# Altium PCB TestDevicePcb.PcbDoc
Units mm, origin at the board's own origin, x right, y up, seen from the top; angles counter-clockwise.
Board outline 100 x 100 mm, 4 copper layers (Top Layer 1, Top Layer, Bottom Layer, Bottom Layer 1), stack 0.602 mm thick; 53 components, 49 nets, 168 pads, 45 vias.
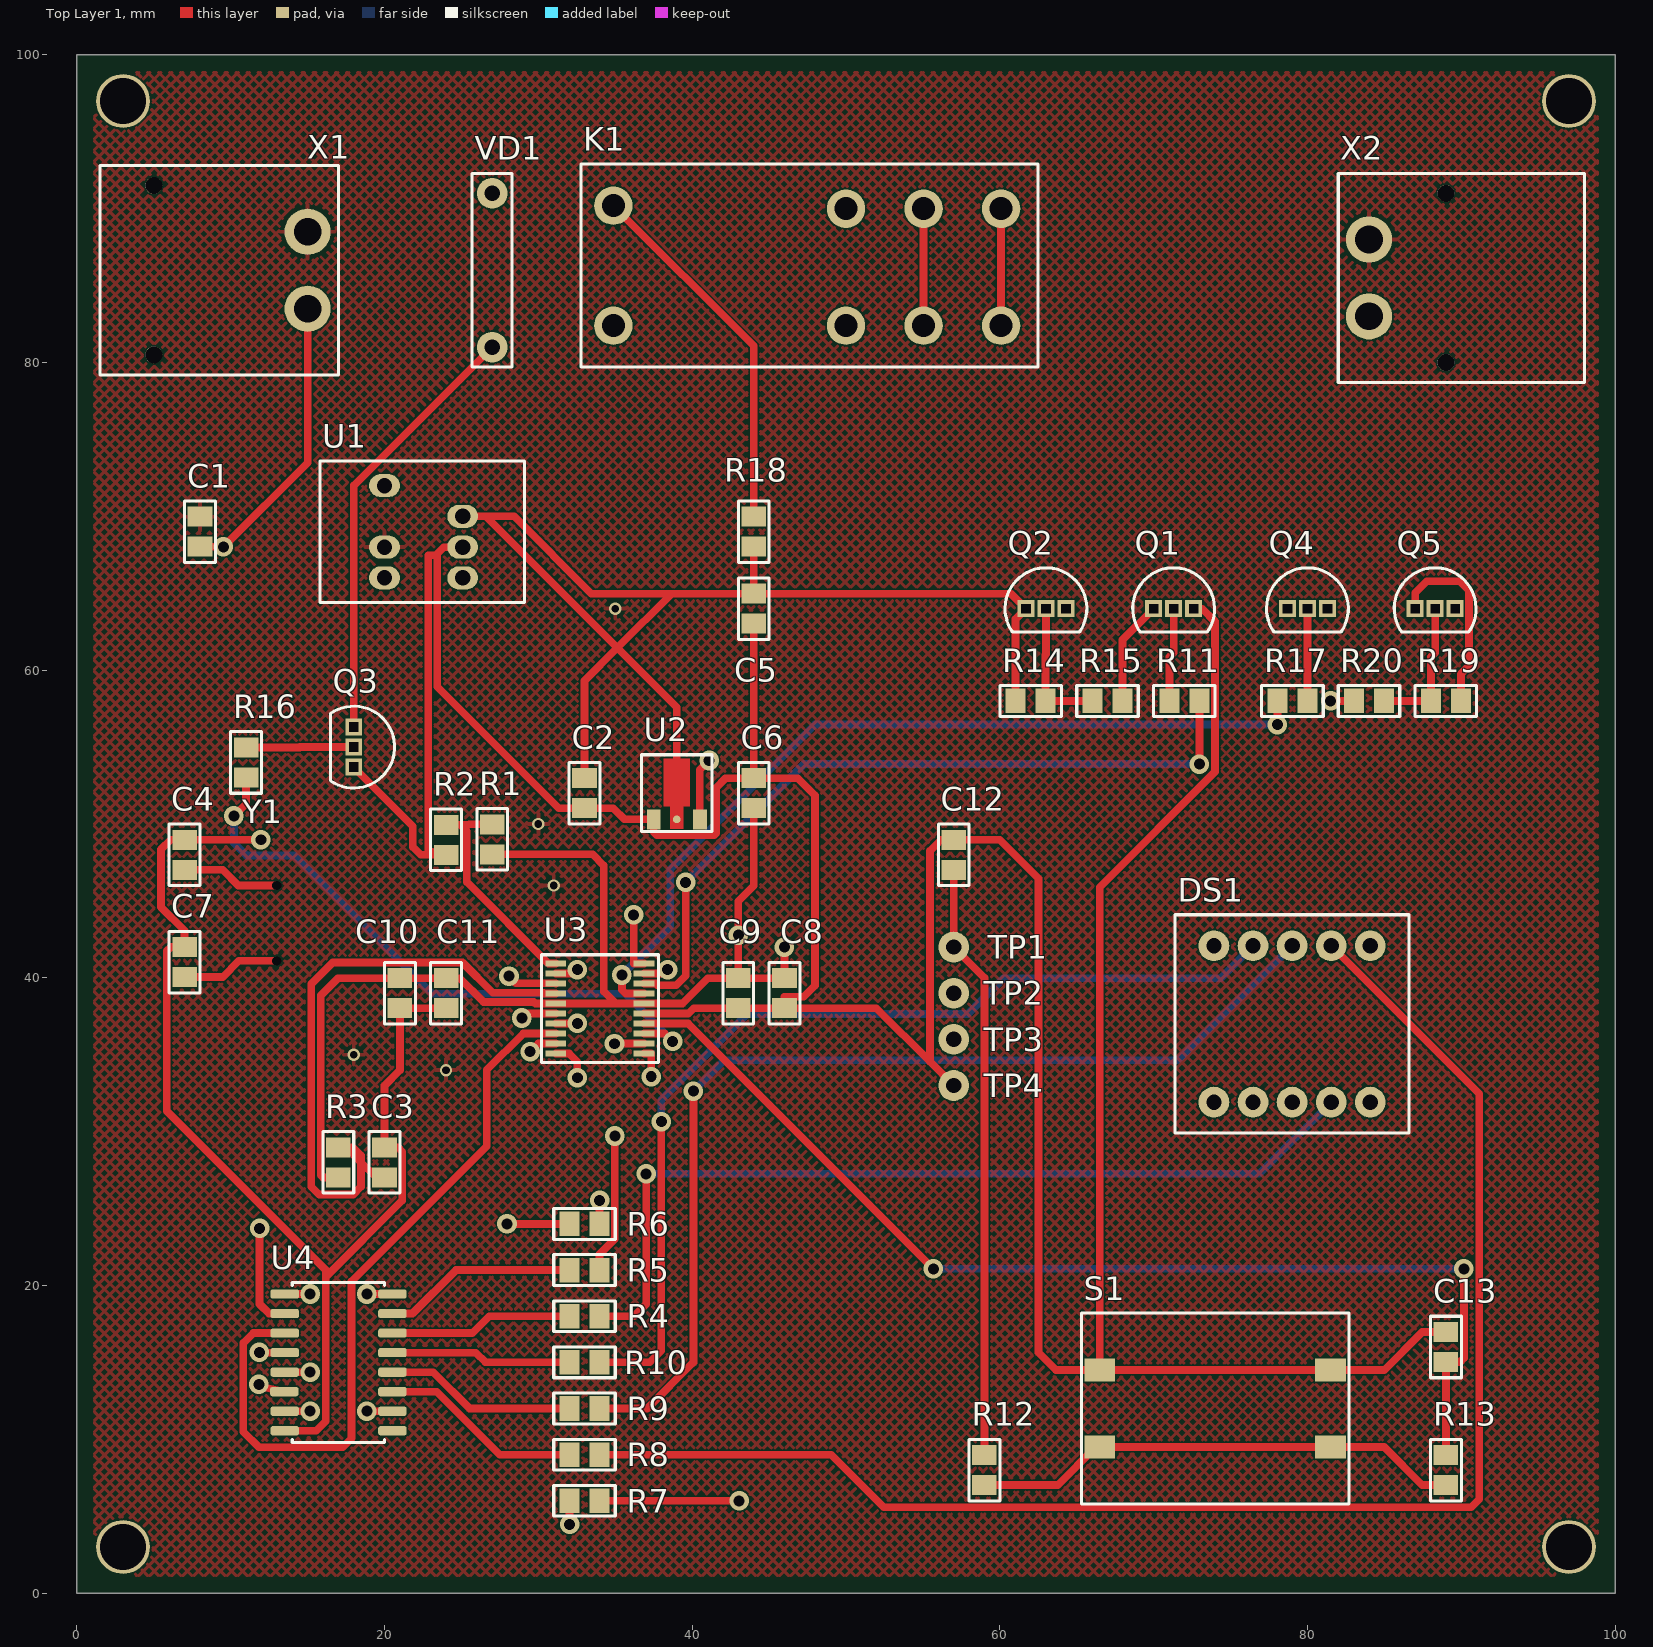
[diagram p0: Top Layer 1 view]
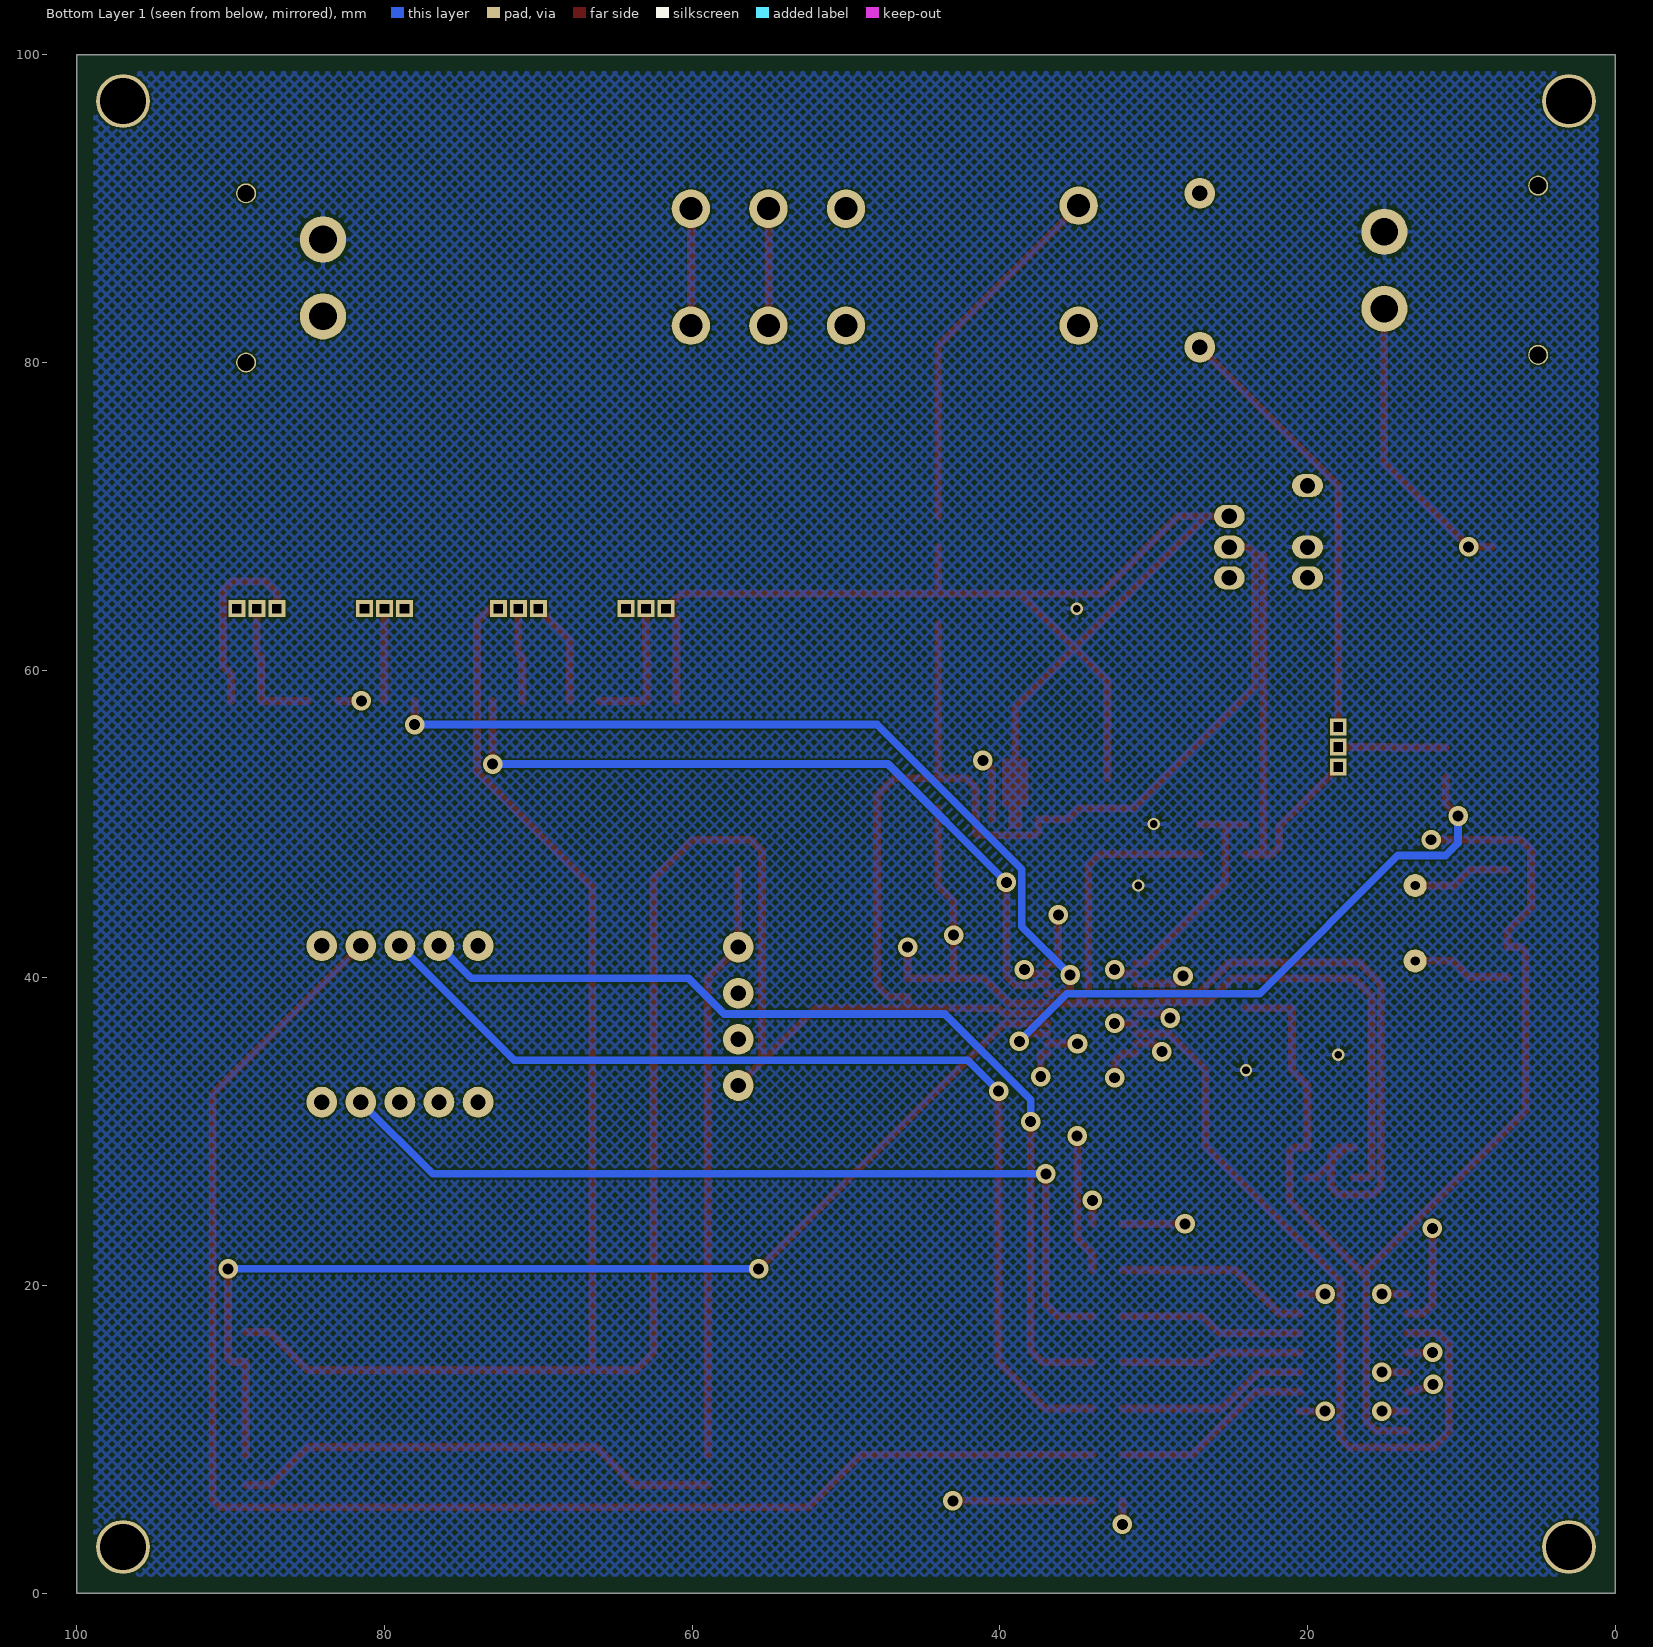
[diagram p1: Bottom Layer 1 view, seen from below]
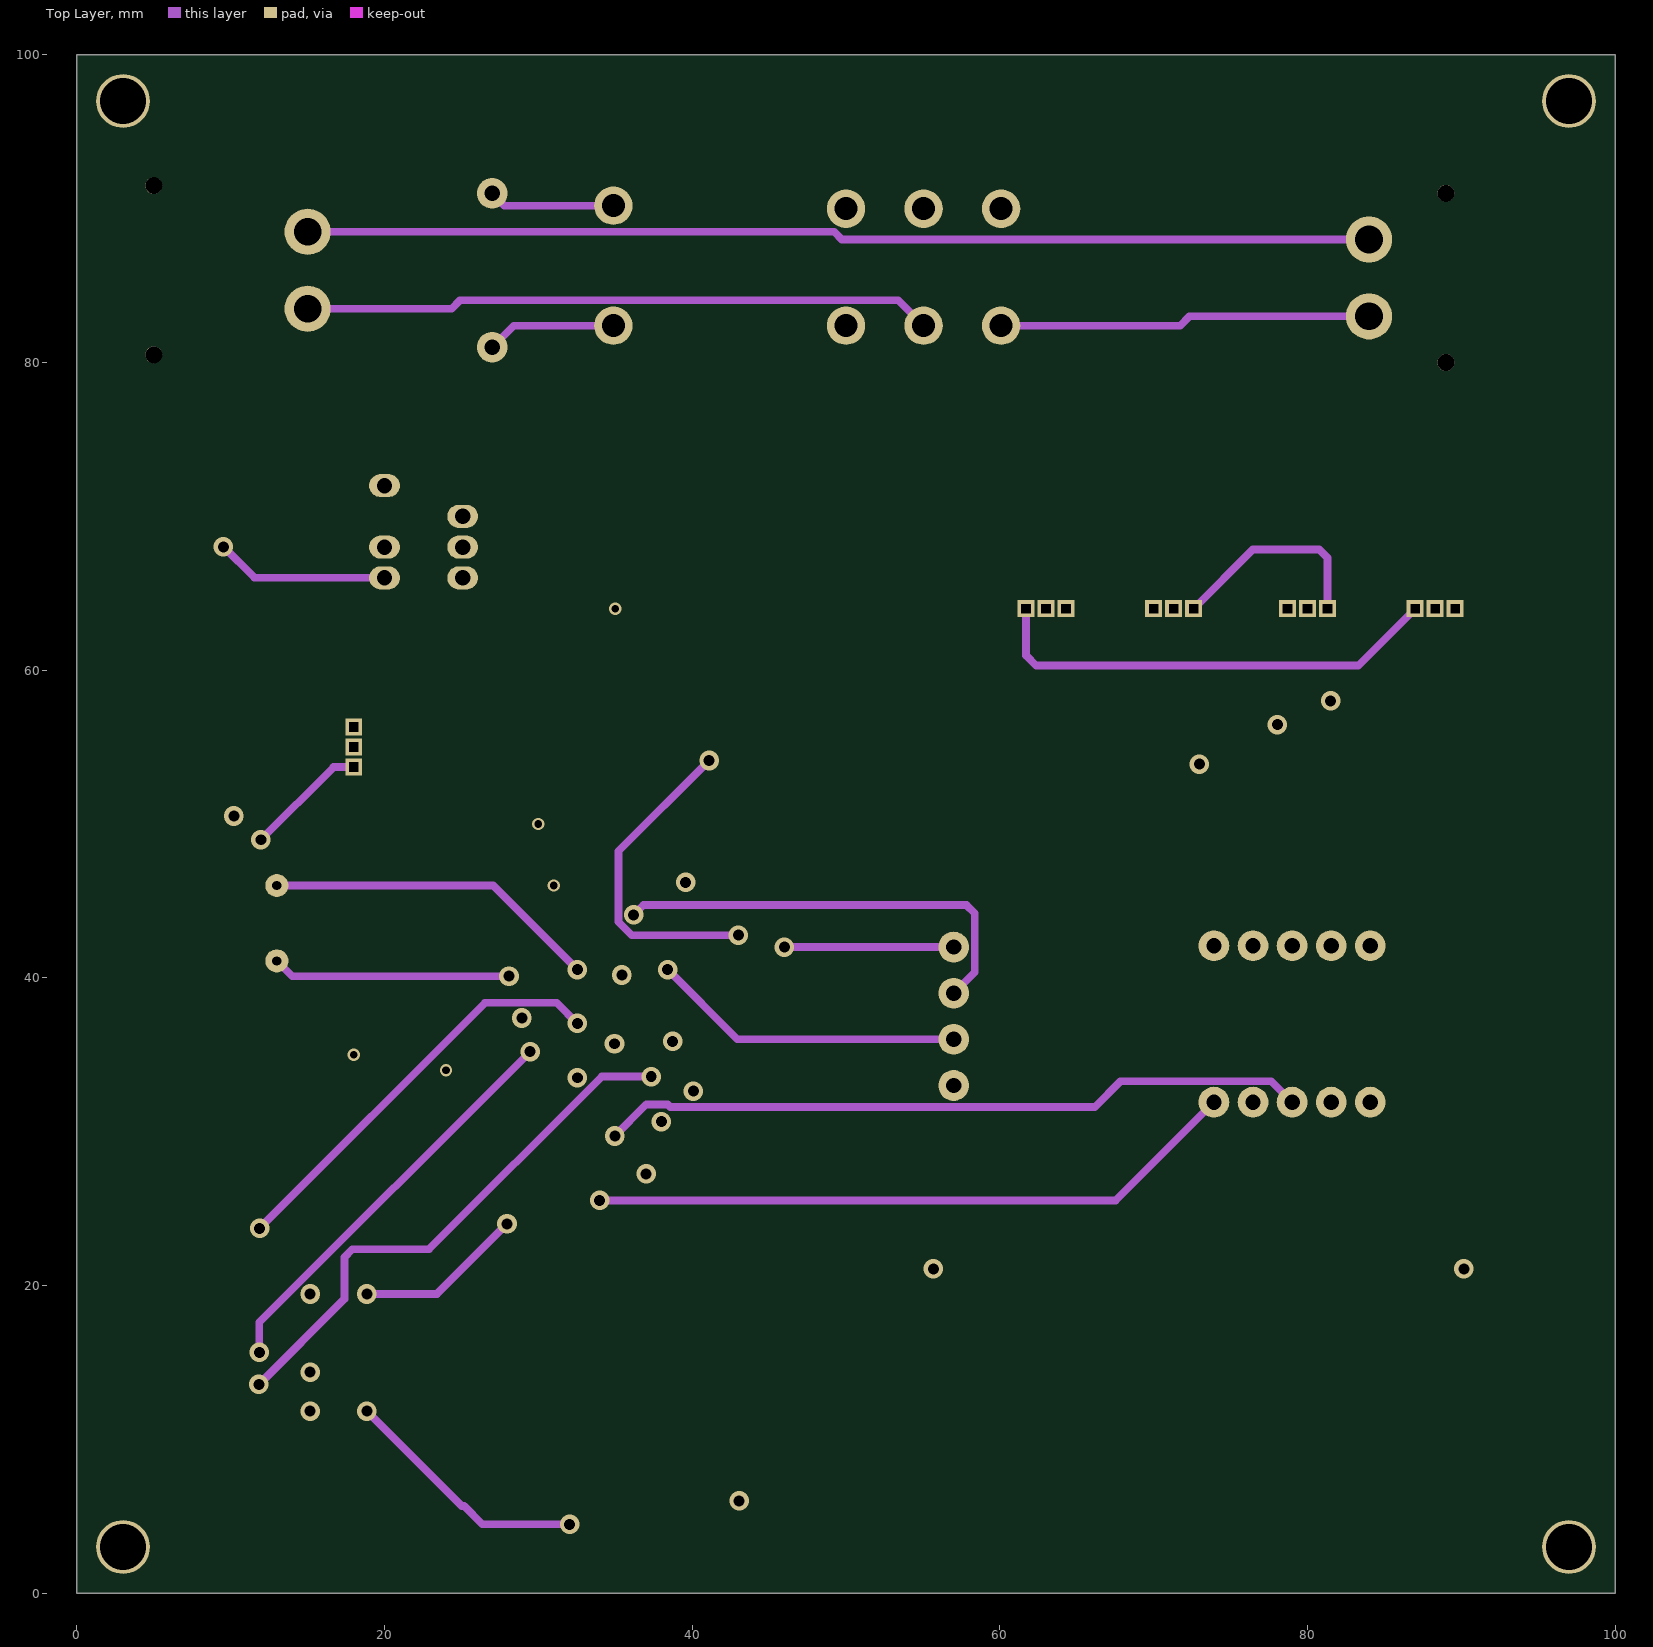
[diagram p2: Top Layer]
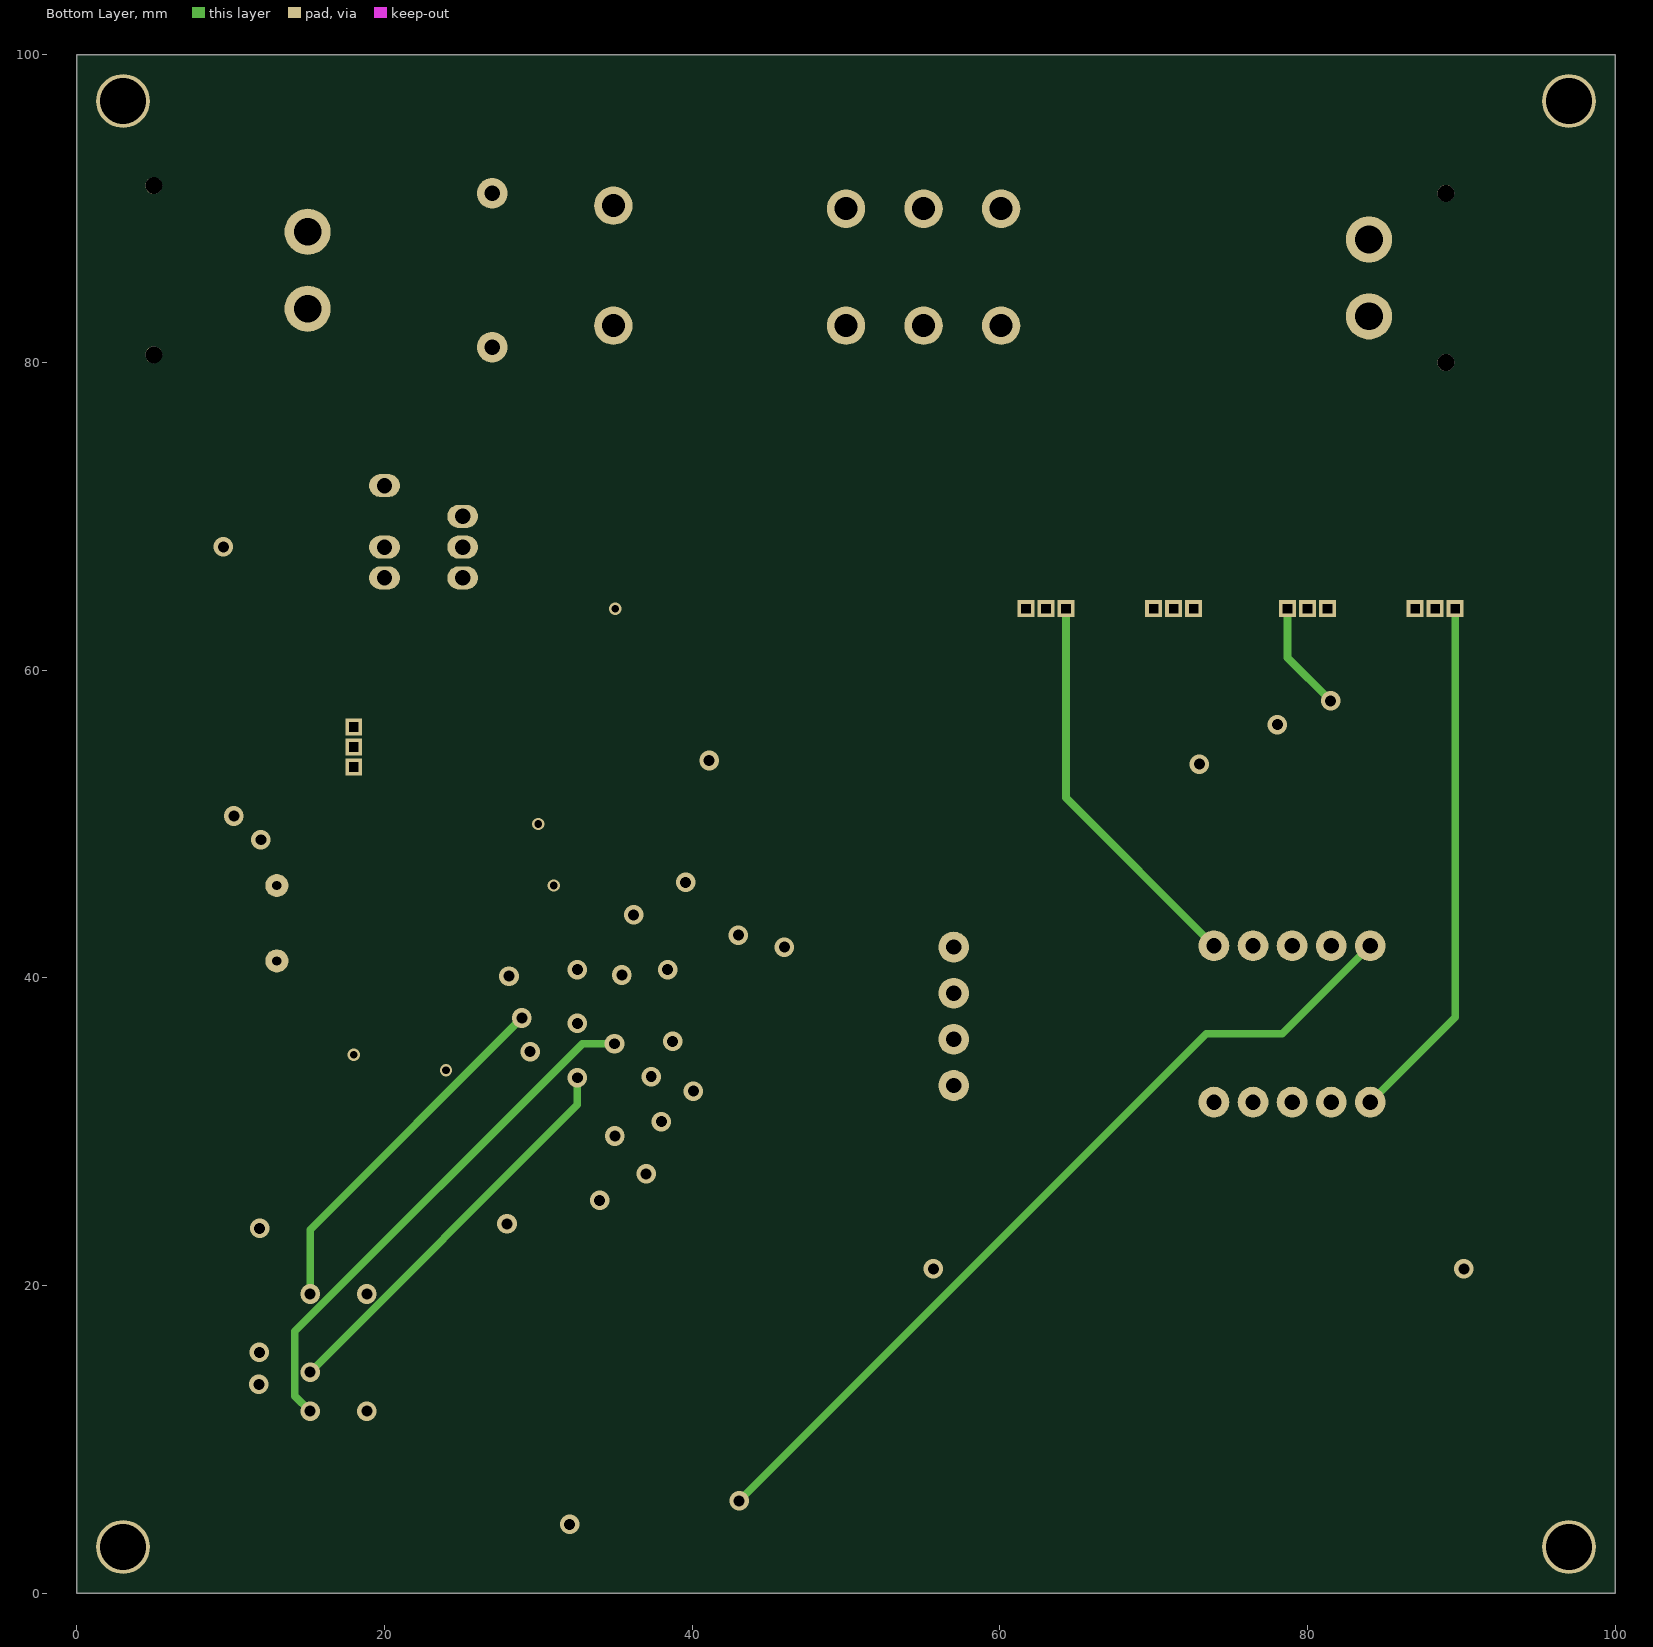
[diagram p3: Bottom Layer]

## Layer stack, top to bottom
Top Solder: solder mask 0.0102, Solder Resist, Dk 3.5
Top Layer 1: signal copper 0.035
Dielectric 2: prepreg 0.0711, PP-006, Dk 4.1
Top Layer: signal copper 0.035
Dielectric 1: dielectric 0.32, FR-4, Dk 4.8
Bottom Layer: signal copper 0.035
Dielectric 3: prepreg 0.0711, PP-006, Dk 4.1
Bottom Layer 1: signal copper 0.035
Bottom Solder: solder mask 0.0102, Solder Resist, Dk 3.5

## Board outline
0,0 100,0 100,100 0,100

## Design rules (kind name [scope] priority, off if disabled: settings)
BoardOutlineClearance [All] p1: gap=1 ignorepadtopadclearanceinfootprint=FALSE
Clearance [All] p1: gap=0.1 ignorepadtopadclearanceinfootprint=TRUE
HoleSize [All] p1: absolutevalues=TRUE maxlimit=3 minlimit=0.025 maxpercent=80.000 minpercent=20.000
MinimumSolderMaskSliver [All] p1: minsoldermaskwidth=0.01
PolygonConnect [All] p1: connectstyle=Relief reliefconductorwidth=0.254 reliefentries=4 polygonreliefangle="90 Angle" airgapwidth=0.254
RoomDefinition TestDeviceSch_Sheet1 [InComponentClass('TestDeviceSch_Sheet1')] p1: confinementstyle=ConfineIn formatcopy=TRUE lockcomponents=FALSE outline 0,0 100,0 100,100 0,100
RoutingVias [All] p1: holewidth=0.711 width=1.27 viastyle="Through Hole" minholewidth=0.711 minwidth=1.27 maxholewidth=0.711 maxwidth=1.27
SilkToSilkClearance [All] p1: silktosilkclearance=0.1
SilkToSolderMaskClearance [IsPad] p1: minsilkscreentomaskgap=0.01 clearancetoexposedcopper=TRUE
SolderMaskExpansion [All] p1: expansion=0.102 istentingtop=FALSE
Width [All] p1: maxlimit=1 minlimit=0.15 preferedwidth=0.5
26 further rules are at their usual default settings.

## Components (designator, comment, footprint, x,y, rotation, side; value= is the part's Value field where it differs from the comment)
C1 "10u" C0805 8,69 r180 top
C2 "1u" C0805 33,52 r180 top
C3 "100n" C0805 20,28 r0 top
C4 "22p" C0805 7,48 r0 top
C5 "1u" C0805 44,64 r180 top
C6 "1u" C0805 44,52 r0 top
C7 "22p" C0805 7,41.025 r0 top
C8 "1u" C0805 46,39 r180 top
C9 "10n" C0805 43,39 r180 top
C10 "100n" C0805 21,39 r180 top
C11 "4.7u" C0805 24,39 r180 top
C12 "100n" C0805 57,48 r0 top
C13 "100n" C0805 89,16 r0 top
DS1 "DISPLAY_7SEG_2DIG_A" DISPLAY_7SEG_2DIG 79,37 r0 top
K1 "JQX-115" JQX-115F 47.48,86.3 r0 top
Q1 "2N2222" TO-92 71.3,64 r0 top
Q2 "2N3906" TO-92 63,64 r0 top
Q3 "2N2222" TO-92 18,55 r270 top
Q4 "2N2222" TO-92 80,64 r0 top
Q5 "2N3906" TO-92 88.3,64 r0 top
R1 "10K" R0805 27,49 r0 top
R2 "10K" R0805 24,48.975 r180 top
R3 "10K" R0805 17,28 r0 top
R4 "330" R0805 33,18 r90 top
R5 "330" R0805 33,21 r90 top
R6 "330" R0805 33,24 r90 top
R7 "330" R0805 33,6 r270 top
R8 "330" R0805 33,9 r270 top
R9 "330" R0805 33,12 r270 top
R10 "330" R0805 33,15 r270 top
R11 "1K" R0805 72,58 r90 top
R12 "10K" R0805 59,8 r0 top
R13 "1K" R0805 89,8 r0 top
R14 "10K" R0805 62,58 r270 top
R15 "4K7" R0805 67,58 r270 top
R16 "1K" R0805 11,54 r0 top
R17 "1K" R0805 79.025,58 r270 top
R18 "3K3" R0805 44,69 r180 top
R19 "10K" R0805 89,58 r90 top
R20 "4K7" R0805 84,58 r90 top
S1 "PTS125SJM73SMTR-2" SMD_BUTTON_SPST_12X12 74,12 r0 top
TP1 "TEST_POINT" TEST_POINT 57,42 r0 top
TP2 "TEST_POINT" TEST_POINT 57,39 r0 top
TP3 "TEST_POINT" TEST_POINT 57,36 r0 top
TP4 "TEST_POINT" TEST_POINT 57,33 r0 top
U1 "TDN 3-2411WI" TDN3WI 22.54,69 r0 top
U2 "MCP1703T-3301E/MB" SOT89-3 39,52 r0 top
U3 "STM32F030F4" TSSOP-20 34,38 r0 top
U4 "ULN2003" SOIC-16 17,15 r0 top
VD1 "1N4007" 1N4007 27,86 r270 top
X1 "XT30PW-M" XT30PW-M 10,86 r90 top
X2 "XT30PW-F" XT30PW-F 86.5,85.5 r270 top
Y1 "20M" XTAL 13,46 r270 top

## Footprints (in the part's own frame and the unit in brackets; to place one, negate y for a bottom-side part, rotate by r counter-clockwise, add the part's x,y. Pads: shape width x height; smd on the part's side, far side on the other; paste and mask are expansions set on the pad)
1N4007 [mm]
  round 2 hole 1: 1(-5,0) 2(5,0)
  silkscreen extent -6.3,-1.3 6.3,1.3, body extent -5.4,-1 5.4,1.01, height 3
C0805 [mm]
  rect 1.6x1.3 smd: 1(0,0.975) 2(0,-0.975)
  silkscreen extent -1,-2 1,2, body extent -0.64,-1 0.64,1, height 0.64
DISPLAY_7SEG_2DIG [mm]
  round 2 hole 1: 1(-5.08,-5.08) 2(-2.54,-5.08) 3(0,-5.08) 4(2.54,-5.08) 5(5.08,-5.08) 6(5.08,5.08) 7(2.54,5.08) 8(0,5.08) 9(-2.54,5.08) 10(-5.08,5.08)
  silkscreen extent -7.6,-7.1 7.6,7.1, body extent -7.5,-7 7.5,7, height 7.2
JQX-115F [mm]
  round 2.5 hole 1.5: 1(-12.6,3.9) 2(2.52,3.7) 3(7.56,3.7) 4(12.6,3.7) 5(12.6,-3.9) 6(7.56,-3.9) 7(2.52,-3.9) 8(-12.6,-3.9)
  silkscreen extent -14.7,-6.6 15,6.6, body extent -14.65,-6.6 14.85,6.4, height 20.6
R0805 [mm]
  rect 1.6x1.3 smd: 1(0,0.975) 2(0,-0.975)
  silkscreen extent -1,-2 1,2, body extent -0.67,-1.15 0.67,1.15, height 0.76
SMD_BUTTON_SPST_12X12 [mm]
  rect 2x1.5 smd: 1(-7.5,2.5) 2(7.5,2.5) 3(-7.5,-2.5) 4(7.5,-2.5)
  silkscreen extent -8.7,-6.2 8.7,6.2, body extent -7.65,-6 7.65,6, height 7.4
SOIC-16 [mm]
  rrect50% 1.85x0.6 smd: 1(-3.486,4.445) 2(-3.486,3.175) 3(-3.486,1.905) 4(-3.486,0.635) 5(-3.486,-0.635) 6(-3.514,-1.905) 7(-3.486,-3.175) 8(-3.486,-4.445) 9(3.514,-4.445) 10(3.514,-3.175) 11(3.514,-1.905) 12(3.514,-0.635) 13(3.514,0.635) 14(3.514,1.905) 15(3.514,3.175) 16(3.514,4.445)
  silkscreen extent -3,-5.2 3,5.2, body extent -2.94,-4.96 2.96,4.94, height 1.5
SOT89-3 [mm]
  rect 0.9x1.3 smd: 1(-1.5,-1.7) 3(1.5,-1.7)
  round 0.5 smd paste-2539.97 mask+0: 2(0,-1.7)
  Top Layer 1 region: -0.45,-2.328 0.45,-2.328 0.45,-0.852 -0.45,-0.852
  Top Layer 1 region: -0.866,-0.862 0.866,-0.862 0.866,2.262 -0.866,2.262
  silkscreen extent -2.3,-2.5 2.3,2.5, body extent -2.25,-2.15 2.25,2.1, height 1.54
TDN3WI [mm]
  oval 2x1.5 hole 1: 1(-2.54,-3) 2(-2.54,-1) 4(-2.54,3) 5(2.54,-3) 6(2.54,-1) 7(2.54,1)
  silkscreen extent -6.74,-4.6 6.56,4.6, body extent -6.66,-4.54 6.54,4.56, height 10.27
TEST_POINT [mm]
  round 2 hole 1: 1(0,0)
TO-92 [mm]
  rect 1.1x1.1 hole 0.6 square: 1(-1.3,0) 2(0,0) 3(1.3,0)
  silkscreen extent -2.66,-1.53 2.66,2.66, body extent -2.4,-1.53 2.4,2.4, height 6
TSSOP-20 [mm]
  rect 1.35x0.4 smd: 1(-2.875,2.925) 2(-2.875,2.275) 3(-2.875,1.625) 4(-2.875,0.975) 5(-2.875,0.325) 6(-2.875,-0.325) 7(-2.875,-0.975) 8(-2.875,-1.625) 9(-2.875,-2.275) 10(-2.875,-2.925) 11(2.875,-2.925) 12(2.875,-2.275) 13(2.875,-1.625) 14(2.875,-0.975) 15(2.875,-0.325) 16(2.875,0.325) 17(2.875,0.975) 18(2.875,1.625) 19(2.875,2.275) 20(2.875,2.925)
  silkscreen extent -3.8,-3.5 3.8,3.5, body extent -3.2,-3.25 3.2,3.25, height 1.1
XT30PW-F [mm]
  round 1.1 / inner round 1.1 / far side round 1.3 hole 1.1: 0(-5.5,2.5) 0(5.5,2.5)
  round 3 hole 1.8: 1(2.5,-2.5) 2(-2.5,-2.5)
  silkscreen extent -6.8,-4.5 6.8,11.5, body extent -6.65,-3.5 6.65,11.4, height 5
XT30PW-M [mm]
  round 1.1 / inner round 1.1 / far side round 1.3 hole 1.1: 0(-5.5,5) 0(5.5,5)
  round 3 hole 1.8: 1(-2.5,-5) 2(2.5,-5)
  silkscreen extent -6.8,-7 6.8,8.5, body extent -6.65,-6 6.65,7.95, height 5
XTAL [mm]
  round 0 / inner round 1.5 / far side round 1.5 hole 0.6: 1(0,0) 2(4.9,0)
  body extent -3.3,-2.5 8.2,2.5, height 4

## Part data
C1: library part C, Manufacturer=Murata, Package=0805, PartNumber=GRM21BR61H106KE43L, Tolerance=10%, Voltage=50V, Component=Capacitor, Type=X5R
C2 C5 C6 C8: library part C, Manufacturer=Murata, Package=0805, PartNumber=GRM21BR71H105KA12L, Tolerance=5%, Voltage=50V, Component=Capacitor, Type=X7R
C3 C10 C12 C13: library part C, Manufacturer=Murata, Package=0805, PartNumber=GRM21BR71H104KA01L, Tolerance=10%, Voltage=50V, Component=Capacitor, Type=X7R
C4 C7: library part C, Manufacturer=YAGEO, Package=0805, PartNumber=CC0805JRNPO9BN220, Tolerance=5%, Voltage=50V, Component=Capacitor
  C4: Type=C0G
  C7: Type=N0G
C9: library part C, Manufacturer=Murata, Package=0805, PartNumber=GRM2195C1H1103JA01D, Tolerance=5%, Voltage=50V, Component=Capacitor, Type=C0G
C11: library part C, Manufacturer=Murata, Package=0805, PartNumber=GRM21BR61H475KE51L, Tolerance=10%, Voltage=50V, Component=Capacitor, Type=X5R
DS1: "7 Segment 2 Digit LED Display with Common Anode", Manufacturer="ARK LED", PartNumber=SN410362, Component=Display
K1: "Miniature High Power Relay", Manufacturer="HONGFA Relay", PartNumber=JQX-115F/0051ZS3AF, Component=Relay
Q1 Q3 Q4: "Amplifier Bipolar NPN Silicon Transistor", Manufacturer="ON Semiconductor", Package=TO-92, PartNumber=P2N2222A, Component="Bipolar Transistor", Lead=Straight
Q2 Q5: "General Purpose Bipolar PNP Silicon Transistor", Manufacturer="ON Semiconductor", Package=TO-92, Component="Bipolar Transistor", Lead=Straight, PartNumber=2N3906
R1 R2 R3 R12 R14 R19: library part R, Manufacturer=YAGEO, Package=0805, PartNumber=RC0805JR-0710KL, Tolerance=5%, Component=Resistor, Type=-
R4 R5 R6 R7 R8 R9 R10: library part R, Manufacturer=YAGEO, Package=0805, PartNumber=RC0805JR-07330RL, Tolerance=5%, Component=Resistor, Type=-
R11 R13 R16 R17: library part R, Manufacturer=YAGEO, Package=0805, PartNumber=RC0805JR-071KL, Tolerance=5%, Component=Resistor, Type=-
R15 R20: library part R, Manufacturer=YAGEO, Package=0805, PartNumber=RC0805JR-074K7L, Tolerance=5%, Component=Resistor, Type=-
R18: library part R, Manufacturer=YAGEO, Package=0805, PartNumber=RC0805JR-073K3L, Tolerance=5%, Component=Resistor, Type=-
S1: "12 mm x 12 mm Tactile Push Button", Manufacturer=Littelfuse, Component=Switch, PartNumber=PTS125SJM73SMTR-2
U1: library part TDN_3WI, Manufacturer="Traco Power", Component="Power Supply", PartNumber="TDN 3-2411WI"
U2: library part MCP1703, "Low Quiescent Current LDO, 250 mA, 16V", Manufacturer=Microchip, Package=SOT89-3, Voltage=3.3V, Component="Voltage Regulator", PartNumber=MCP1703T-3301E/MB
U3: Manufacturer=STMicroelectronics, Package=TSSOP-20, Component=Microcontroller, PartNumber=STM32F030F4
U4: "High-Voltage, High-Current Darlington Transistor Array", Manufacturer="Texas Instruments", Package=SOIC-16, PartNumber=ULN2003ADR, Component="Integrated Circuit"
VD1: "General Purpose Plastic Rectifier", Manufacturer=Vishay, PartNumber=1N4007-E3/54, Component=Diode
X1 X2: Manufacturer=AMASS, Component=Connector
  X1: Gender=Male, PartNumber=XT30PW-M
  X2: Gender=Female, PartNumber=XT30PW-F
Y1: library part XTAL, "Crystal Oscillator", Manufacturer=IQD, Package=THT, PartNumber="LF XTAL003185", Tolerance=30ppm, Voltage=-, Component="Crystal Oscillator", Type=-

## Free pads (board coordinates)
  round 3.5 hole 3: M1(3,97) M2(97,97) M3(3,3) M4(97,3)

## Via types
v1: diameter 1.27, hole 0.711, Top Layer 1 to Bottom Layer 1, 40 vias
v2: diameter 0.8, hole 0.5, Top Layer 1 to Bottom Layer 1, 5 vias

## Nets (pads, with @x,y where several pads share a name; then routed paths per layer and width w, separated by ;. In a path a pad name is that pad's centre, name@x,y a point inside that pad or via, vN(x,y) a via of type N, cw(c..) or ccw(c..) an arc to the next point about the centre after c; other vN are vias at no path point)
3V3: C6.2 C8.2 C9.2 C10.2 C11.2 C12.2 R1.2 R3.2 R12.1 TP1.1 U2.3 U3.5 U3.16 | length 150.3
  Top Layer 1 w0.5: R3.2 16.002,27.025 15.85,27.177 15.85,38.85 16.975,39.975 C10.2 21,39.98 22.83,39.98 22.835,39.975 C11.2 24.892,39.975 26.437,38.43 29.705,38.43 29.811,38.325 U3.5 35.046,38.325 ; R1.2 33.528,48.025 34.255,47.298 34.255,39.116 35.046,38.325 ; U2.3 40.5,53.53 v1(41.097,54.127) ; C6.2 44,45.983 43,44.983 v1(43,42.774) C9.2 ; v1(46,42) C8.2 C9.2 ; C12.2 TP1.1 59,40 R12.1 ; 35.046,38.325 U3.16 39.366,38.325 41.016,39.975 C9.2
  Top Layer w0.5: v1(41.097,54.127) 35.204,48.235 35.204,43.637 36.068,42.774 v1(43,42.774) ; v1(46,42) TP1.1
5V: C2.2 C5.2 Q2.1 Q5.1 R14.2 R18.1 R19.2 U1.7 U2.2 | length 130.3
  Top Layer 1 w0.5: U1.7 26.582,70 ; C2.2 33,59.316 35.133,61.449 ; U2.2 39,57.582 35.133,61.449 ; R18.1 C5.2 ; R14.2 61.025,63.325 Q2.1 60.725,64.975 C5.2 ; Q5.1 87,65.024 87.762,65.786 89.916,65.786 90.5,65.202 90.5,60.274 89.975,59.749 R19.2 ; 26.582,70 28.427,70 33.452,64.975 38.659,64.975 ; 26.582,70 35.133,61.449 ; 35.133,61.449 38.659,64.975 ; 38.659,64.975 C5.2
  Top Layer w0.5: Q2.1 61.7,60.96 62.36,60.3 83.3,60.3 Q5.1
Boot: R1.1 R2.2 U3.1 | length 14.9
  Top Layer 1 w0.5: R2.2 24.929,49.95 ; R1.1 25.501,49.975 25.476,49.95 24.929,49.95 ; U3.1 30.658,40.925 25.349,46.234 25.349,49.53 24.929,49.95
BTN: C13.2 R13.1 U3.14 | length 73
  Top Layer 1 w0.5: U3.14 39.735,37.025 v1(55.678,21.082) ; R13.1 C13.2 89.916,15.025 90.17,15.279 v1(90.17,21.082)
  Bottom Layer 1 w0.5: v1(55.678,21.082) v1(90.17,21.082)
CDIG1: R11.2 U3.18 | length 49.8
  Top Layer 1 w0.5: U3.18 37.642,39.625 37.744,39.522 38.964,39.522 39.573,40.132 v1(39.573,46.203) ; v1(72.975,53.899) R11.2
  Bottom Layer 1 w0.5: v1(39.573,46.203) 47.269,53.899 v1(72.975,53.899)
CDIG2: R17.2 U3.17 | length 55.6
  Top Layer 1 w0.5: v1(35.433,40.183) 35.433,39.229 35.687,38.975 U3.17 ; v1(78.05,56.464) R17.2
  Bottom Layer 1 w0.5: v1(35.433,40.183) 38.583,43.332 38.583,47.066 47.981,56.464 v1(78.05,56.464)
DIG1: DS1.10 Q2.3 | length 25.9
  Bottom Layer w0.5: Q2.3 64.3,51.7 DS1.10
DIG2: DS1.5 Q5.3 | length 34.4
  Bottom Layer w0.5: DS1.5 89.6,37.44 Q5.3
DIG_GND: C2.1 C3.1 C4.1 C5.1 C6.1 C7.1 C8.1 C9.1 C10.1 C11.1 C12.1 C13.1 Q1.3 Q3.3 Q4.3 R2.1 S1.1 S1.2 TP4.1 U1.6 U2.1 U3.15 U4.8 | length 354.1
  Top Layer 1 w0.5: v1(11.963,48.975) C4.1 6.096,48.975 5.465,48.344 5.465,44.602 7,43.067 C7.1 6.096,42 5.842,41.746 5.842,31.344 16.18,21.006 16.18,20.549 ; U4.8 15.559,10.555 16.18,11.176 16.18,20.549 ; Q3.3 21.844,49.856 21.844,48.508 22.352,48 R2.1 22.835,48.26 22.835,67.467 23.419,67.467 ; C11.1 C10.1 21,33.995 20,32.995 C3.1 20.885,28.975 21.158,28.702 21.158,25.527 16.18,20.549 ; U1.6 23.855,68 23.419,67.564 23.419,67.467 ; U3.15 39.751,37.675 40.101,38.025 C9.1 C8.1 ; C5.1 C6.1 ; TP4.1 55.465,34.535 ; Q1.3 73.152,64 73.99,63.162 73.99,53.391 66.497,45.898 S1.1@66.497,14.5 ; C13.1 87.465,16.975 84.99,14.5 S1.2 S1.1 S1.1@66.497,14.5 ; 23.419,67.467 23.419,58.928 31.322,51.025 C2.1 34.874,51.025 35.599,50.3 U2.1 37.5,49.47 37.694,49.276 41.427,49.276 41.554,49.403 41.554,52.365 42.164,52.975 C6.1 ; C6.1 46.863,52.975 47.981,51.857 47.981,39.497 47.244,38.76 46,38.76 C8.1 ; C8.1 51.975,38.025 55.465,34.535 ; 55.465,34.535 55.465,48.26 56.18,48.975 C12.1 59.995,48.975 62.509,46.46 62.509,15.646 63.656,14.5 S1.1@66.497,14.5
  Top Layer w0.5: v1(11.963,48.975) 16.688,53.7 Q3.3 ; Q1.3 76.443,67.843 80.772,67.843 81.3,67.315 Q4.3
IN24V: C1.1 K1.3 K1.6 U1.1 X1.1 | length 79.1
  Top Layer 1 w0.5: C1.1 v1@9.529,68.025 ; v1(9.529,68.021) v1@9.529,68.025 ; X1.1 15,73.496 v1@9.529,68.025 ; K1.6 K1.3
  Top Layer w0.5: v1(9.529,68.021) 11.55,66 U1.1 ; X1.1 24.359,83.5 24.907,84.049 53.391,84.049 K1.6
LED_A: R5.1 U4.15 | length 12.7
  Top Layer 1 w0.5: U4.15 21.819,18.175 24.644,21 R5.1
LED_B: R10.2 U4.13 | length 11.8
  Top Layer 1 w0.5: U4.13 25.933,15.635 26.568,15 R10.2
LED_C: R9.2 U4.12 | length 12.5
  Top Layer 1 w0.5: U4.12 23.165,14.365 25.53,12 R9.2
LED_D: R7.2 U4.10 | length 19.4
  Top Layer 1 w0.5: v1(18.847,11.836) 18.858,11.825 U4.10 ; R7.2 32.025,4.475 v1(32.029,4.47)
  Top Layer w0.5: v1(18.847,11.836) 25.019,5.664 25.171,5.664 26.365,4.47 v1(32.029,4.47)
LED_E: R8.2 U4.11 | length 13.2
  Top Layer 1 w0.5: U4.11 23.393,13.095 27.488,9 R8.2
LED_F: R4.1 U4.14 | length 12
  Top Layer 1 w0.5: U4.14 25.705,16.905 26.8,18 R4.1
LED_G: R6.1 U4.16 | length 16.7
  Top Layer 1 w0.5: v1(18.847,19.445) U4.16 ; v1(27.962,24) R6.1
  Top Layer w0.5: v1(18.847,19.445) 23.407,19.445 v1(27.962,24)
NetDS1_1: DS1.1 R6.2 | length 44.1
  Top Layer 1 w0.5: R6.2 33.975,25.517 v1(33.985,25.527)
  Top Layer w0.5: v1(33.985,25.527) 67.527,25.527 DS1.1
NetDS1_3: DS1.3 R5.2 | length 55.3
  Top Layer 1 w0.5: R5.2 33.975,22.022 34.976,23.023 v1(34.976,29.718)
  Top Layer w0.5: v1(34.976,29.718) 37.028,31.77 38.405,31.77 38.577,31.598 66.167,31.598 67.843,33.274 77.646,33.274 DS1.3
NetDS1_4: DS1.4 R4.2 | length 58.3
  Top Layer 1 w0.5: R4.2 36.212,18 37.008,18.796 v1(37.008,27.254)
  Bottom Layer 1 w0.5: v1(37.008,27.254) 76.874,27.254 DS1.4
NetDS1_6: DS1.6 R7.1 | length 65
  Top Layer 1 w0.5: R7.1 v1(43.053,6)
  Bottom Layer w0.5: v1(43.053,6) 73.411,36.358 78.358,36.358 DS1.6
NetDS1_7: DS1.7 R8.1 | length 98.8
  Top Layer 1 w0.5: R8.1 49.039,9 52.451,5.588 90.653,5.588 91.161,6.096 91.161,32.459 DS1.7
NetDS1_8: DS1.8 R9.1 | length 67.8
  Top Layer 1 w0.5: R9.1 37.084,12 40.081,14.997 v1(40.081,32.639)
  Bottom Layer 1 w0.5: v1(40.081,32.639) 42.092,34.65 71.57,34.65 DS1.8
NetDS1_9: DS1.9 R10.1 | length 63.3
  Top Layer 1 w0.5: R10.1 37.25,15 37.998,15.748 v1(37.998,30.658)
  Bottom Layer 1 w0.5: v1(37.998,30.658) 37.998,32.08 43.568,37.65 57.912,37.65 60.242,39.98 74.36,39.98 DS1.9
NetK1_1: K1.1 R18.2 VD1.1 | length 32.2
  Top Layer 1 w0.5: K1.1 44,81.08 R18.2
  Top Layer w0.5: VD1.1 27.8,90.2 K1.1
NetK1_8: K1.8 Q3.1 VD1.2 | length 36.9
  Top Layer 1 w0.5: Q3.1 18,72 VD1.2
  Top Layer w0.5: VD1.2 28.4,82.4 K1.8
NetQ1_1: Q1.1 R15.1 | length 6.8
  Top Layer 1 w0.5: R15.1 67.975,61.975 Q1.1
NetQ1_2: Q1.2 R11.1 | length 6.1
  Top Layer 1 w0.5: R11.1 71.025,60.858 71.3,61.133 Q1.2
NetQ2_2: Q2.2 R14.1 R15.2 | length 9.1
  Top Layer 1 w0.5: Q2.2 63,61.01 62.975,60.985 R14.1 R15.2
NetQ3_2: Q3.2 R16.1 | length 7
  Top Layer 1 w0.5: R16.1 14.478,54.975 14.503,55 Q3.2
NetQ4_1: Q4.1 R20.1 | length 8.7
  Top Layer 1 w0.5: v1(81.504,58) R20.1
  Bottom Layer w0.5: Q4.1 78.7,60.804 v1(81.504,58)
NetQ4_2: Q4.2 R17.1 | length 6
  Top Layer 1 w0.5: R17.1 Q4.2
NetQ5_2: Q5.2 R19.1 R20.2 | length 9.2
  Top Layer 1 w0.5: R20.2 R19.1 88.025,60.858 88.3,61.133 Q5.2
NetR12_2: R12.2 R13.2 S1.3 S1.4 | length 32.1
  Top Layer 1 w0.5: R12.2 63.768,7.025 66.243,9.5 S1.3 S1.4 84.99,9.5 87.465,7.025 R13.2
NetU3_6: U3.6 U4.1 | length 27.6
  Top Layer 1 w0.5: U4.1 v1(15.164,19.445) ; v1(28.931,37.389) 29.217,37.675 U3.6
  Bottom Layer w0.5: v1(15.164,19.445) 15.164,23.622 v1(28.931,37.389)
NetU3_7: U3.7 U4.2 | length 35.5
  Top Layer 1 w0.5: v1(11.873,23.71) 11.873,18.796 12.494,18.175 U4.2 ; U3.7 32.529,37.025 v1(32.537,37.033)
  Top Layer w0.5: v1(11.873,23.71) 26.537,38.374 31.197,38.374 v1(32.537,37.033)
NetU3_8: U3.8 U4.3 | length 49.5
  Top Layer 1 w0.5: U4.3 11.469,16.905 10.82,16.256 10.82,10.49 11.836,9.474 17.272,9.474 17.856,10.058 17.856,20.269 26.645,29.058 26.645,34.011 29.009,36.375 U3.8
NetU3_9: U3.9 U4.4 | length 30.4
  Top Layer 1 w0.5: v1(11.862,15.646) 11.873,15.635 U4.4 ; v1(29.464,35.204) 29.985,35.725 U3.9
  Top Layer w0.5: v1(11.862,15.646) 11.862,17.602 v1(29.464,35.204)
NetU3_10: U3.10 U4.5 | length 30.7
  Top Layer 1 w0.5: U4.5 v1(15.164,14.365) ; U3.10 32.006,35.075 32.537,34.544 v1(32.537,33.503)
  Bottom Layer w0.5: v1(15.164,14.365) 32.537,31.739 v1(32.537,33.503)
NetU3_11: U3.11 U4.6 | length 39.1
  Top Layer 1 w0.5: v1(11.836,13.564) 11.836,13.451 U4.6 ; U3.11 37.338,35.075 v1(37.338,33.579)
  Top Layer w0.5: v1(11.836,13.564) 17.399,19.126 17.399,21.844 17.907,22.352 22.885,22.352 34.112,33.579 v1(37.338,33.579)
NetU3_12: U3.12 U4.7 | length 37.7
  Top Layer 1 w0.5: U4.7 v1(15.164,11.825) ; v1(34.95,35.712) 34.963,35.725 U3.12
  Bottom Layer w0.5: v1(15.164,11.825) 14.173,12.816 14.173,17.018 32.868,35.712 v1(34.95,35.712)
OSCin: C4.2 U3.2 Y1.1 | length 29.7
  Top Layer 1 w0.5: C4.2 9.474,47.025 10.499,46 Y1.1 ; U3.2 32.274,40.275 v1(32.537,40.538)
  Top Layer w0.5: Y1.1 27.076,46 v1(32.537,40.538)
OSCout: C7.2 U3.3 Y1.2 | length 25.2
  Top Layer 1 w0.5: C7.2 9.474,40.05 10.524,41.1 Y1.2 ; v1(28.092,40.107) 28.549,39.65 30.986,39.65 U3.3
  Top Layer w0.5: Y1.2 13.993,40.107 v1(28.092,40.107)
OUT24V: K1.4 K1.5 X2.1 | length 31.8
  Top Layer 1 w0.5: K1.5 K1.4
  Top Layer w0.5: K1.5 71.73,82.4 72.33,83 X2.1
PWR_GND: C1.2 U1.2 X1.2 X2.2 | length 69.2
  Top Layer w0.5: X1.2 49.225,88.5 49.725,88 X2.2
  other v2: 24,34 18,35 31,46 30,50 35,64
RELAY: R16.2 U3.13 | length 40.5
  Top Layer 1 w0.5: v1(10.211,50.521) 11,51.31 R16.2 ; U3.13 38.225,36.375 v1(38.735,35.865)
  Bottom Layer 1 w0.5: v1(10.211,50.521) 10.211,48.768 11.024,47.955 14.122,47.955 23.114,38.964 35.636,38.964 v1(38.735,35.865)
RST: C3.2 R3.1 U3.4 | length 41.2
  Top Layer 1 w0.5: R3.1 R3.1@17.501,28.975 ; C3.2 19.451,27.025 18.466,28.01 ; U3.4 30.404,38.975 30.349,39.03 27.035,39.03 25.07,40.996 16.637,40.996 15.24,39.599 15.24,26.416 15.748,25.908 17.958,25.908 18.466,26.416 18.466,28.01 ; R3.1@17.501,28.975 17.939,28.975 18.466,28.448 18.466,28.01 ; R3.1@17.501,28.975 18.466,28.01
SWCLK: TP2.1 U3.20 | length 32.3
  Top Layer 1 w0.5: v1(36.195,44.094) 36.195,40.925 U3.20
  Top Layer w0.5: v1(36.195,44.094) 36.83,44.729 57.836,44.729 58.369,44.196 58.369,40.369 TP2.1
SWDIO: TP3.1 U3.19 | length 22.1
  Top Layer 1 w0.5: U3.19 38.141,40.275 v1(38.405,40.538)
  Top Layer w0.5: v1(38.405,40.538) 42.943,36 TP3.1
pads on no net: DS1.2 K1.2 K1.7 U1.4 U1.5 U4.9 X1.0 X2.0

## Polygon pours and split planes (outlines as drawn)
PWR_GND on Top Layer 1 "PWR_GND_L01_P000" (hatched 45Degree grid 0.508 track 0.203, remove dead copper, pour order 0): 0,100 100,100 100,0 0,0
PWR_GND on Bottom Layer 1 "PWR_GND_L04_P001" (hatched 45Degree grid 0.508 track 0.203, remove dead copper, pour order 1): 0,100 100,100 100,0 0,0